# Altium PCB HLib-Sensor-Accel_Gyro.PcbDoc
Units mil, origin at the board's own origin, x right, y up, seen from the top; angles counter-clockwise.
Board outline 828 x 2360 mil, 2 copper layers (Top Layer, Bottom Layer); 23 components, 19 nets, 85 pads, 11 vias.
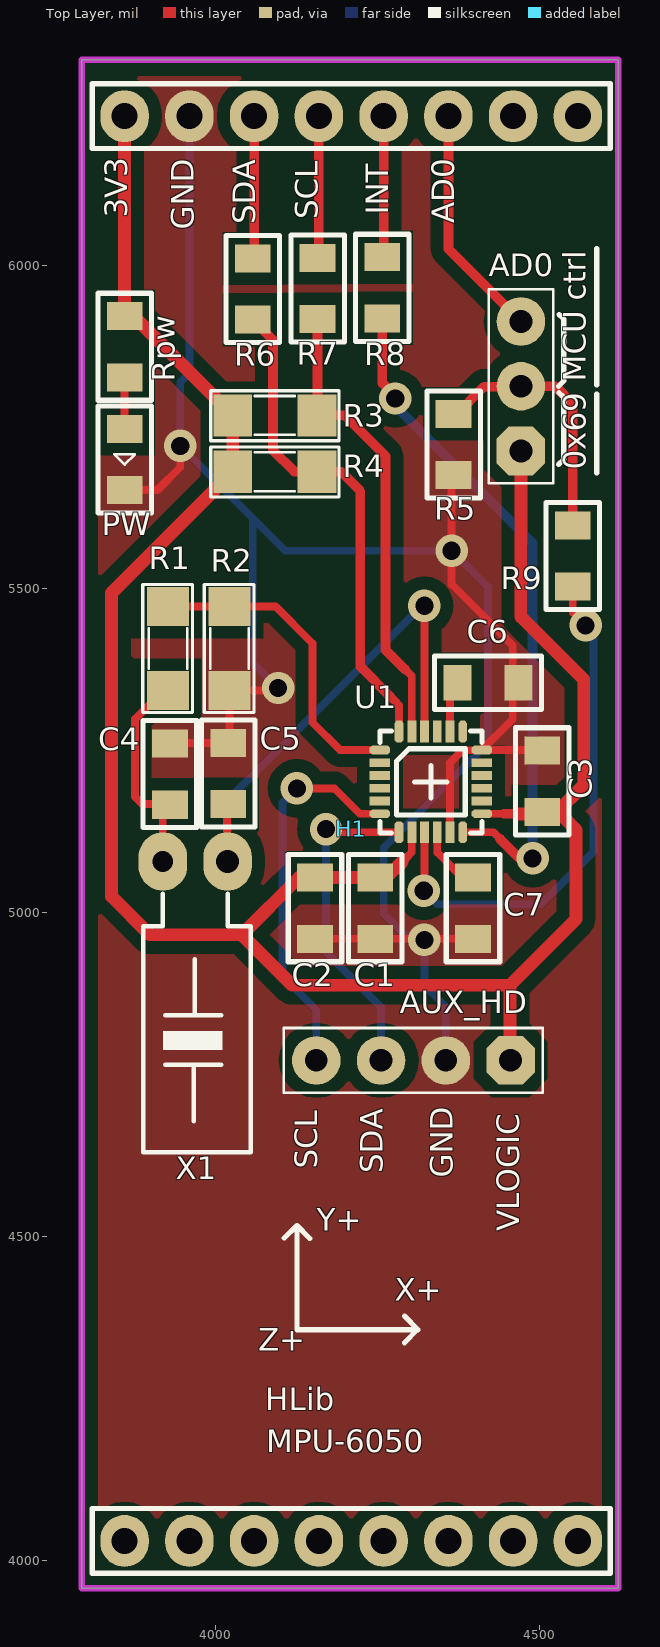
[diagram p0: Top Layer view]
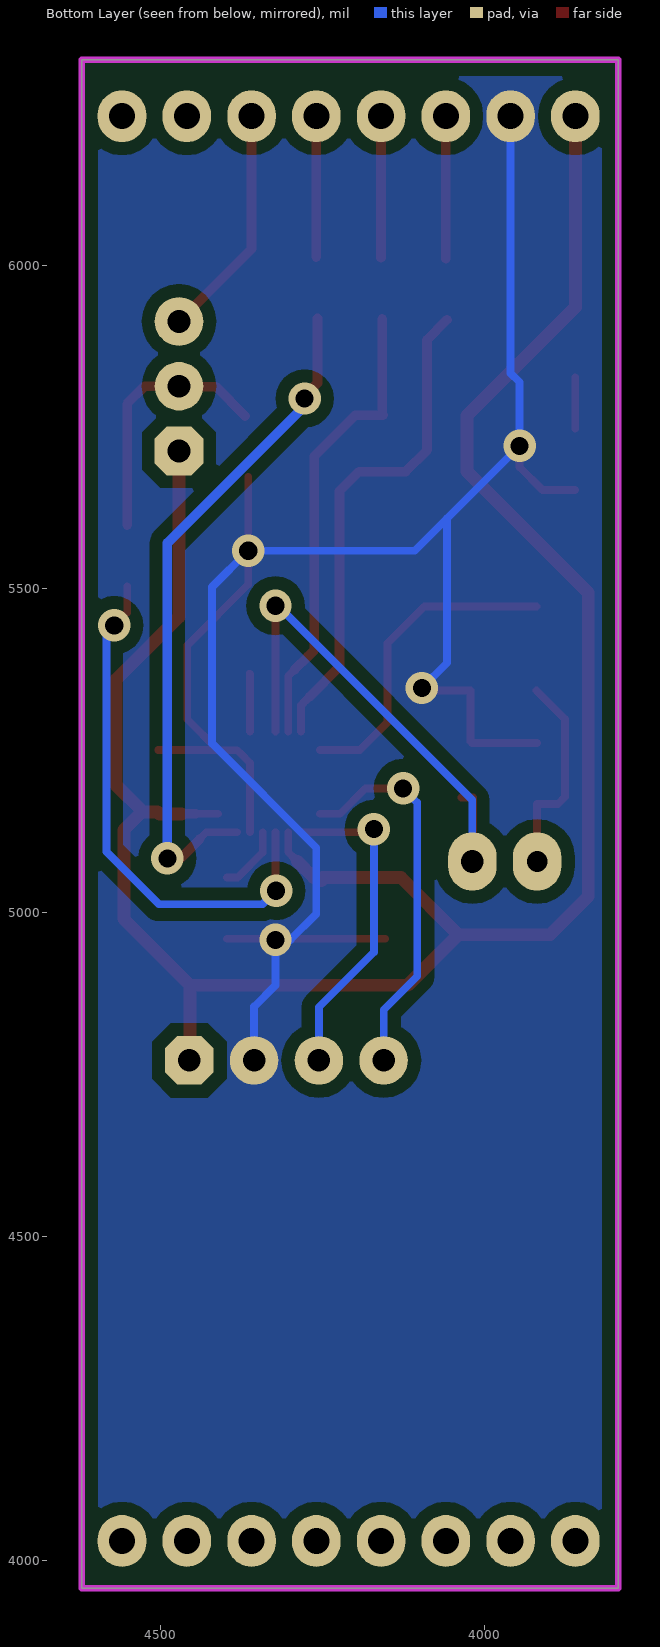
[diagram p1: Bottom Layer view, seen from below]
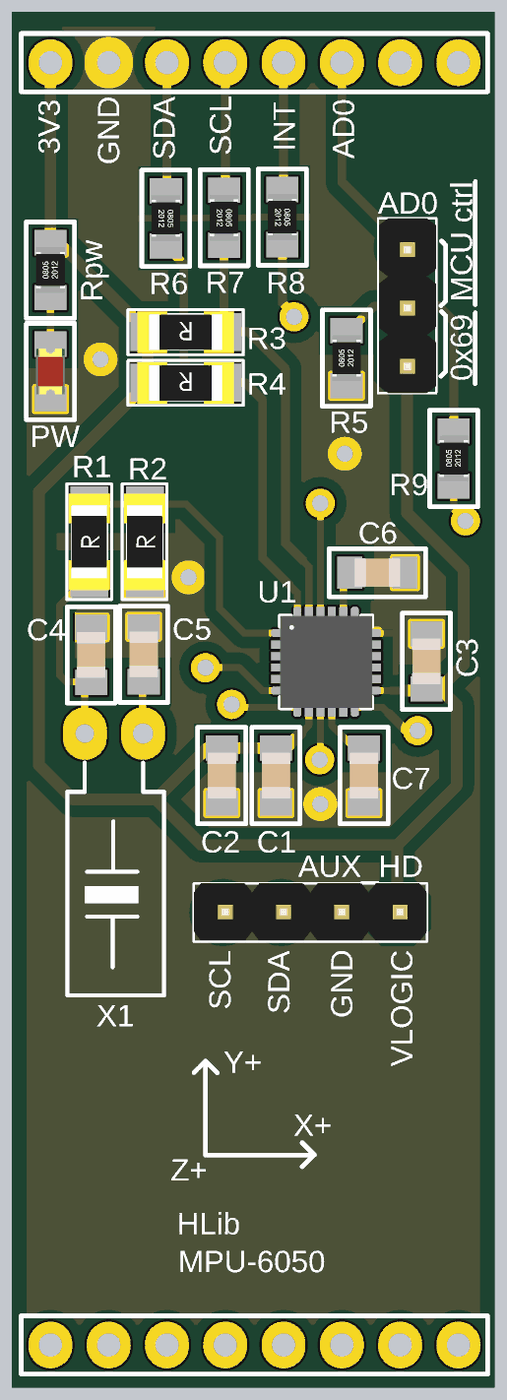
[diagram p2: 3D render of the assembled board from above, using the file's embedded part models]

## Layer stack, top to bottom
Top Layer: signal copper 1.4
Dielectric: core 12.6, FR-4, Dk 4.8
Bottom Layer: signal copper 1.4

## Board outline
3794,6317 4622,6317 4622,3957 3794,3957

## Design rules (kind name [scope] priority, off if disabled: settings)
Clearance [All] p1: gap=20
PolygonConnect [All] p1: connectstyle=Direct reliefconductorwidth=10 reliefentries=4 polygonreliefangle="90 Angle" airgapwidth=10
RoutingVias [All] p1: holewidth=25 width=40 viastyle="Through Hole" minholewidth=28 minwidth=50 maxholewidth=28 maxwidth=50
SolderMaskExpansion [All] p1: expansion=4
Width [All] p1: maxlimit=20 minlimit=12 preferedwidth=12
28 further rules are at their usual default settings.

## Components (designator, comment, footprint, x,y, rotation, side; value= is the part's Value field where it differs from the comment)
AD0 "HEADER 3" HD_MALE_3 4472,5713 r90 top
AUX_HD "HEADER 4" HD_MALE_4 4456,4772 r180 top
C1 "CAP" SM_0805_C_CERAMIC 4247,5007 r90 top
C2 "CAP" SM_0805_C_CERAMIC 4154,5007 r90 top
C3 "CAP" SM_0805_C_CERAMIC 4505,5203 r270 top
C4 "CAP" SM_0805_C_CERAMIC 3930,5214 r270 top
C5 "CAP" SM_0805_C_CERAMIC 4020,5215 r270 top
C6 "CAP" SM_0805_C_CERAMIC 4421,5355 r180 top
C7 "CAP" SM_0805_C_CERAMIC 4398,5007 r90 top
H1 "MBoard1_BH_DualPorts" MBoard1_BH_DualPorts 3860,6230 r0 top
PW "LED" SM_0805_LED 3860,5700 r270 top
R1 "0" SM-1206 3927,5408 r90 top
R2 "0" SM-1206 4022,5408 r90 top
R3 "10k" SM-1206 4092,5768 r180 top
R4 "10k" SM-1206 4092,5681 r180 top
R5 "R" SM_0805_R 4368,5723 r90 top
R6 "R" SM_0805_R 4058,5963 r270 top
R7 "R" SM_0805_R 4158,5964 r270 top
R8 "R" SM_0805_R 4258,5965 r270 top
R9 "R" SM_0805_R 4552,5551 r90 top
Rpw "R" SM_0805_R 3860,5874 r90 top
U1 "MPU-6050" QFN-24 4333,5202 r0 top
X1 "32,768 Khz" XT32k 4019,5079 r270 top

## Footprints (in the part's own frame and the unit in brackets; to place one, negate y for a bottom-side part, rotate by r counter-clockwise, add the part's x,y. Pads: shape width x height; smd on the part's side, far side on the other; paste and mask are expansions set on the pad)
HD_MALE_3 [mil]
  oct 75x75 hole 35: 1(0,0)
  round 75 hole 35: 2(100,0) 3(200,0)
  silkscreen extent -50,-50 250,50, body extent -50,-50 250,49, height 323
HD_MALE_4 [mil]
  oct 75x75 hole 35: 1(0,0)
  round 75 hole 35: 2(100,0) 3(200,0) 4(300,0)
  silkscreen extent -50,-50 350,50, body extent -50,-50 350,48, height 323
MBoard1_BH_DualPorts [mil]
  oval 75x80 hole 40.16: 1(0,0) 2(100,0) 3(200,0) 4(300,0) 5(400,0) 6(500,0) 7(600,0) 8(700,0) 9(700,-2200) 10(600,-2200) 11(500,-2200) 12(400,-2200) 13(300,-2200) 14(200,-2200) 15(100,-2200) 16(0,-2200)
  silkscreen extent -50,-2250 750,50, body extent -50,-2250 750,50, height 315
QFN-24 [mm] "24 Lead QFN (4x4x0.9) mm"
  oct 0.8x0.35 smd: 1(-2,1.25) 6(-2,-1.25) 13(2,-1.25) 18(2,1.25)
  rect 0.8x0.35 smd: 2(-2,0.75) 3(-2,0.25) 4(-2,-0.25) 5(-2,-0.75) 14(2,-0.75) 15(2,-0.25) 16(2,0.25) 17(2,0.75)
  oct 0.35x0.85 smd: 7(-1.25,-1.975) 12(1.25,-1.975) 19(1.25,1.975) 24(-1.25,1.975)
  rect 0.35x0.85 smd: 8(-0.75,-1.975) 9(-0.25,-1.975) 10(0.25,-1.975) 11(0.75,-1.975) 20(0.75,1.975) 21(0.25,1.975) 22(-0.25,1.975) 23(-0.75,1.975)
  silkscreen extent -2,-2 2,2, body extent -2,-2 2,2, height 0.9
SM-1206 [mil] "Compoment SMD 120x60mil"
  rect 60x65 smd: 1(-65,0) 2(65,0)
  silkscreen extent -99,-38 99,39, body extent -83,-35 83,36, height 25
SM_0805_C_CERAMIC [mm] "General Surface-mount cap, low density"
  rect 1.1x1.4 smd: 1(-1.2,0) 2(1.2,0)
  silkscreen extent -2.1,-1.05 2.1,1.05, body extent -1,-0.62 1,0.63, height 0.58
SM_0805_LED [mm] "General polarized surface-mount Led, low density"
  rect 1.1x1.4 smd: 1(-1.2,0) 2(1.2,0)
  silkscreen extent -2.1,-1.05 2.1,1.05, body extent -1.01,-0.62 1.01,0.63, height 1.1
SM_0805_R [mm] "General Surface-mount resistor, low density"
  rect 1.1x1.4 smd: 1(-1.2,0) 2(1.2,0)
  silkscreen extent -2.1,-1.05 2.1,1.05, body extent -1,-0.63 1,0.62, height 0.45
XT32k [mil] "Crystal 32k, 2 pin, real timer for DS1307"
  oval 90x75 hole 35: 1(0,0)
  oval 90x75 hole 32: 2(0,-100)
  silkscreen extent 50,-130 449,36

## Part data
AD0: library part HD_3, "Header single row 3 pins"
AUX_HD: library part HD_4, "Header single row 4 pins"
C1 C2 C3 C4 C5 C6 C7: "Capacitor"
R1 R2 R3 R4: library part R, "Resistor 1/4W"
R5 R6 R7 R8 R9 Rpw: "Resistor"
U1: library part MPU_6050, "Motion processing unit"
X1: library part XT32k, "Crystal 32,768kHz for timer real"

## Via types
v1: diameter 50, hole 28, Top Layer to Bottom Layer, 11 vias

## Nets (pads, with @x,y where several pads share a name; then routed paths per layer and width w, separated by ;. In a path a pad name is that pad's centre, name@x,y a point inside that pad or via, vN(x,y) a via of type N, cw(c..) or ccw(c..) an arc to the next point about the centre after c; other vN are vias at no path point)
3V3: AD0.1 AUX_HD.1 C1.2 C2.2 C3.2 H1.1 R3.2 R4.2 Rpw.2 U1.8 U1.13 | length 3558.5
  Top Layer w12: 4293.67,5083.67 4303.47,5093.47 U1.8 ; U1.13 4445.6,5152.79
  Top Layer w14: 4288.76,5078.76 4293.67,5083.67 ; 4445.6,5152.79 4468.17,5152.79
  Top Layer w20: H1.1 3860,5935 R3.2 R4.2 3840,5494 3840,5025 3899,4966 4041,4966 ; C1.2@4251,5054.24 C1.2 C2.2 4129.24,5054.24 4041,4966 ; C1.2@4252,5050 4256.24,5054.24 4264.24,5054.24 4288.76,5078.76 ; AUX_HD.1@4455,4773 4455,4888 ; 4468.17,5152.79 C3.2@4502.03,5152.79 ; AD0.1 4472,5457 4569,5360 4569,5197 4527.76,5155.76 C3.2 4529.24,5155.76 4557,5128 4557,4990 4455,4888 ; 4041,4966 4119,4888 4455,4888
GND: AUX_HD.2 C1.1 C2.1 C3.1 C4.1 C5.1 C6.1 C7.1 H1.2 PW.2 R2.1 R5.1 U1.11 U1.18 | length 3599.2
  Top Layer w8: U1.18@4411.55,5251.02 U1.18
  Top Layer w12: PW.2 3910.76,5652.76 3946,5688 v1(3946,5721) ; C4.1@3919,5262.24 C5.1 ; C5.1@4022,5264.24 R2.1 4093,5343 v1(4097,5347) ; C2.1 C1.1 C7.1 ; U1.11 4362.53,5231.53 4376.02,5245.02 ; R5.1@4365,5673 v1(4365,5559) 4365,5507 4459.24,5412.76 4459.24,5298.72 U1.18 C3.1@4504.03,5251.21 ; 4377.01,5246.01 4382.02,5251.02 U1.18@4411.55,5251.02
  Bottom Layer w12: v1@3958,5733 v1(3946,5721) ; H1.2 3960,5833 3946,5819 v1(3946,5721) ; v1@4100,5347 v1(4097,5347) 4058,5386 4058,5609 ; AUX_HD.2 4356,4855 4323,4888 v1(4323,4958) 4300,4958 4260,4998 4260,5100.46 4421,5261.46 4421,5503 v1(4365,5559) 4108,5559 4058,5609 ; v1(3946,5721) 4058,5609
NetAD0_2: AD0.2 R5.2 R9.2 | length 431.9
  Top Layer w15: R5.2@4370,5767 4415.24,5812.24 AD0.2@4504.24,5812.24 ; AD0.2 4525,5813 4552,5786 R9.2
NetAD0_3: AD0.3 H1.6 | length 363.4
  Top Layer w15: H1.6 4360,6025 AD0.3
NetAUX_HD_3: AUX_HD.3 U1.7 | length 528.4
  Top Layer w12: v1@4171,5124.24 U1.7 ; v1@4172,5138.95 v1@4183.05,5138.95
  Bottom Layer w12: v1@4172,5138.95 4171,5139.95 4171,4939 4256,4854 AUX_HD.3
  other v1: 4171,5129
NetAUX_HD_4: AUX_HD.4 U1.6 | length 595.2
  Top Layer w12: v1(4126,5192) 4184,5192 4223.21,5152.79 U1.6
  Bottom Layer w12: v1(4126,5192) 4104,5170 4104,4902 4156,4850 AUX_HD.4
NetC4_2: C4.2 R1.1 X1.2 | length 318.6
  Top Layer w12: X1.2 3919,5167.76 3887.24,5167.76 3876,5179 3876,5299 R1.1@3920,5343
NetC5_2: C5.2 U1.22 X1.1 | length 848.8
  Top Layer w12: C5.2@4035.76,5177.76 4018,5177.76 4018,5111 X1.1@4049,5080 ; U1.22 v1@4323.16,5478.16
  Bottom Layer w12: X1.1 4019,5174 v1@4321,5476
  other v1: 4323,5474
NetC6_2: C6.2 U1.20 | length 91.8
  Top Layer w8: C6.2@4363.32,5368.77 4363.32,5369.57 C6.2@4364.76,5371
  Top Layer w12: U1.20 C6.2@4362.53,5368.77
NetC7_2: C7.2 U1.10 | length 102.4
  Top Layer w12: U1.10 4342.84,5093.16 4381.76,5054.24 C7.2
NetH1_3: H1.3 R6.1 | length 219.8
  Top Layer w15: R6.1@4060,6010.24 H1.3
NetH1_4: H1.4 R7.1 | length 218.8
  Top Layer w15: R7.1@4160,6011.24 H1.4
NetH1_5: H1.5 R8.1 | length 217.8
  Top Layer w15: R8.1@4260,6012.24 H1.5
NetPW_1: PW.1 Rpw.1 | length 79.5
  Top Layer w12: PW.1 Rpw.1
NetR1_2: R1.2 R2.2 U1.1 | length 497.6
  Top Layer w12: R1.2@3920,5473 R2.2 4093,5473 4150,5416 4150,5294 4192.79,5251.21 U1.1
NetR3_1: R3.1 R7.2 U1.23 | length 721.9
  Top Layer w12: 4293.35,5375.65 4303.47,5365.53 U1.23
  Top Layer w15: R3.1 4200,5768 4263,5705 4263,5406 4273.12,5395.88 4293.35,5375.65 ; R3.1@4158,5769 R7.2
NetR4_1: R4.1 R6.2 U1.24 | length 771.7
  Top Layer w12: 4280.36,5323.64 4283.79,5320.21 U1.24
  Top Layer w13: 4270.09,5333.91 4273.51,5330.49 4280.36,5323.64
  Top Layer w15: R6.2 4089,5884.76 4089,5714 4122,5681 R4.1 4194,5681 4224,5651 4224,5380 4270.09,5333.91
NetR8_2: R8.2 U1.12 | length 1054.3
  Top Layer w12: U1.12 4429.76,5124.24 4439.82,5114.18
  Top Layer w15: R8.2 4258,5818 v1@4280,5796 ; 4439.82,5114.18 4470,5084 v1(4490,5084)
  Bottom Layer w15: v1@4280,5796 4280,5781 4490,5571 v1(4490,5084)
  other v1: 4278,5794
NetR9_1: R9.1 U1.9 | length 820.3
  Top Layer w12: v1(4322,5034) 4323.16,5032.84 U1.9 ; R9.1 4552,5463.78 v1(4572,5443.78)
  Bottom Layer w12: v1(4322,5034) 4343,5013 4503,5013 4584,5094 4584,5431.78 v1(4572,5443.78)
pads on no net: H1.7 H1.8 H1.9 H1.10 H1.11 H1.12 H1.13 H1.14 H1.15 H1.16 U1.2 U1.3 U1.4 U1.5 U1.14 U1.15 U1.16 U1.17 U1.19 U1.21

## Polygon pours and split planes (outlines as drawn)
GND on Top Layer "Top Overlay-No Net" (solid, remove dead copper, pour order 11): 3794,6317 4622,6317 4622,3957 3794,3957
GND on Bottom Layer "Top Overlay-No Net" (solid, remove dead copper, pour order 13): 3794,6317 4622,6317 4622,3957 3794,3957

## Keep-outs
Keep-Out Layer:
  the board outline again, w10

## Silkscreen, mask and mechanical layers (free items; w line width, h text height)
Top Overlay:
  lines w8: 4106.5,4497.5 4126,4517 ; 4146,4497 4126,4517 ; 4292,4336 4312,4356 4313,4356 ; 4292,4377 4313,4356 ; 4530,5692 4538,5700 4538,5796 ; 4530,5813 4538,5821 4538,5917 ; 4531,5803 4537,5797 ; 4531,5924 4537,5918 ; 4589,5679 4589,5800.79 ; 4589,5815 4589,6025.89 ; 4126,4517 4126,4356 4313,4356
  text "INT" at 4279,6078 h60 r90
  text "3V3" at 3876,6073 h60 r90
  text "SCL" at 4170,6071 h60 r90
  text "AD0" at 4381,6065 h60 r90
  text "SDA" at 4073,6063 h60 r90
  text "GND" at 3978,6055 h60 r90
  text "MCU ctrl" at 4583.36,5820 h60 r90
  text "0x69" at 4583.36,5684 h60 r90
  text "SCL" at 4169,4605 h60 r90
  text "SDA" at 4270,4598 h60 r90
  text "GND" at 4378,4591 h60 r90
  text "VLOGIC" at 4481,4508 h60 r90
  text "Y+" at 4157,4497 h60
  text "X+" at 4277,4389 h60
  text "Z+" at 4066,4312 h60
  text "HLib" at 4077,4220 h60
  text "MPU-6050" at 4079,4155 h60

## Dimensions
3794,3957 to 3794,6317 on Mechanical 1
3794,3957 to 4622,3957 on Mechanical 1